# Altium PCB Airplane_System_Board.PcbDoc
Units mil, origin at the board's own origin, x right, y up, seen from the top; angles counter-clockwise.
Board outline 1525 x 1740 mil, 4 copper layers (Top Layer, Layer 1, Layer 2, Bottom Layer), stack 23.756 mil thick; 34 components, 22 nets, 201 pads, 33 vias.
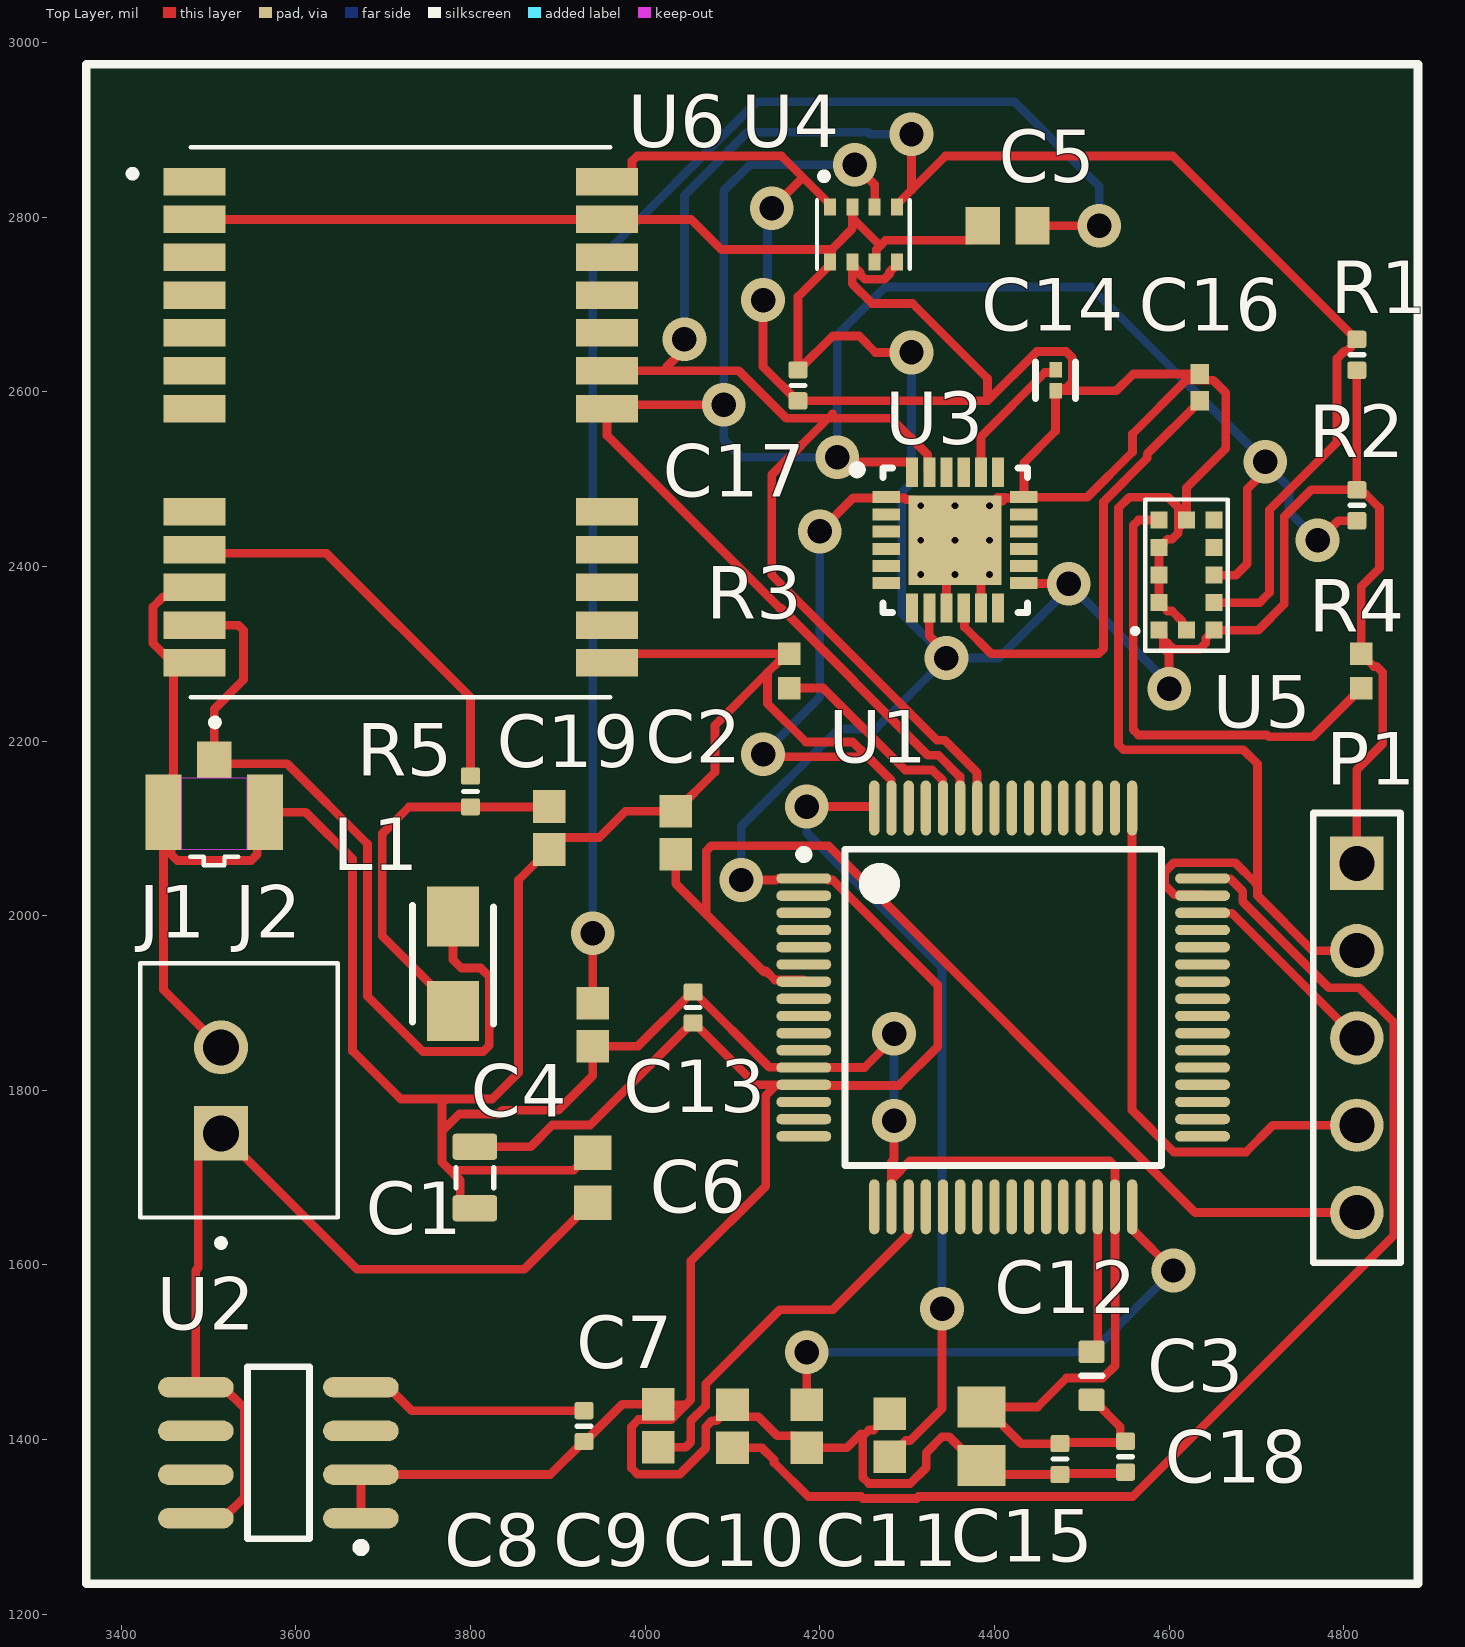
[diagram p0: Top Layer view]
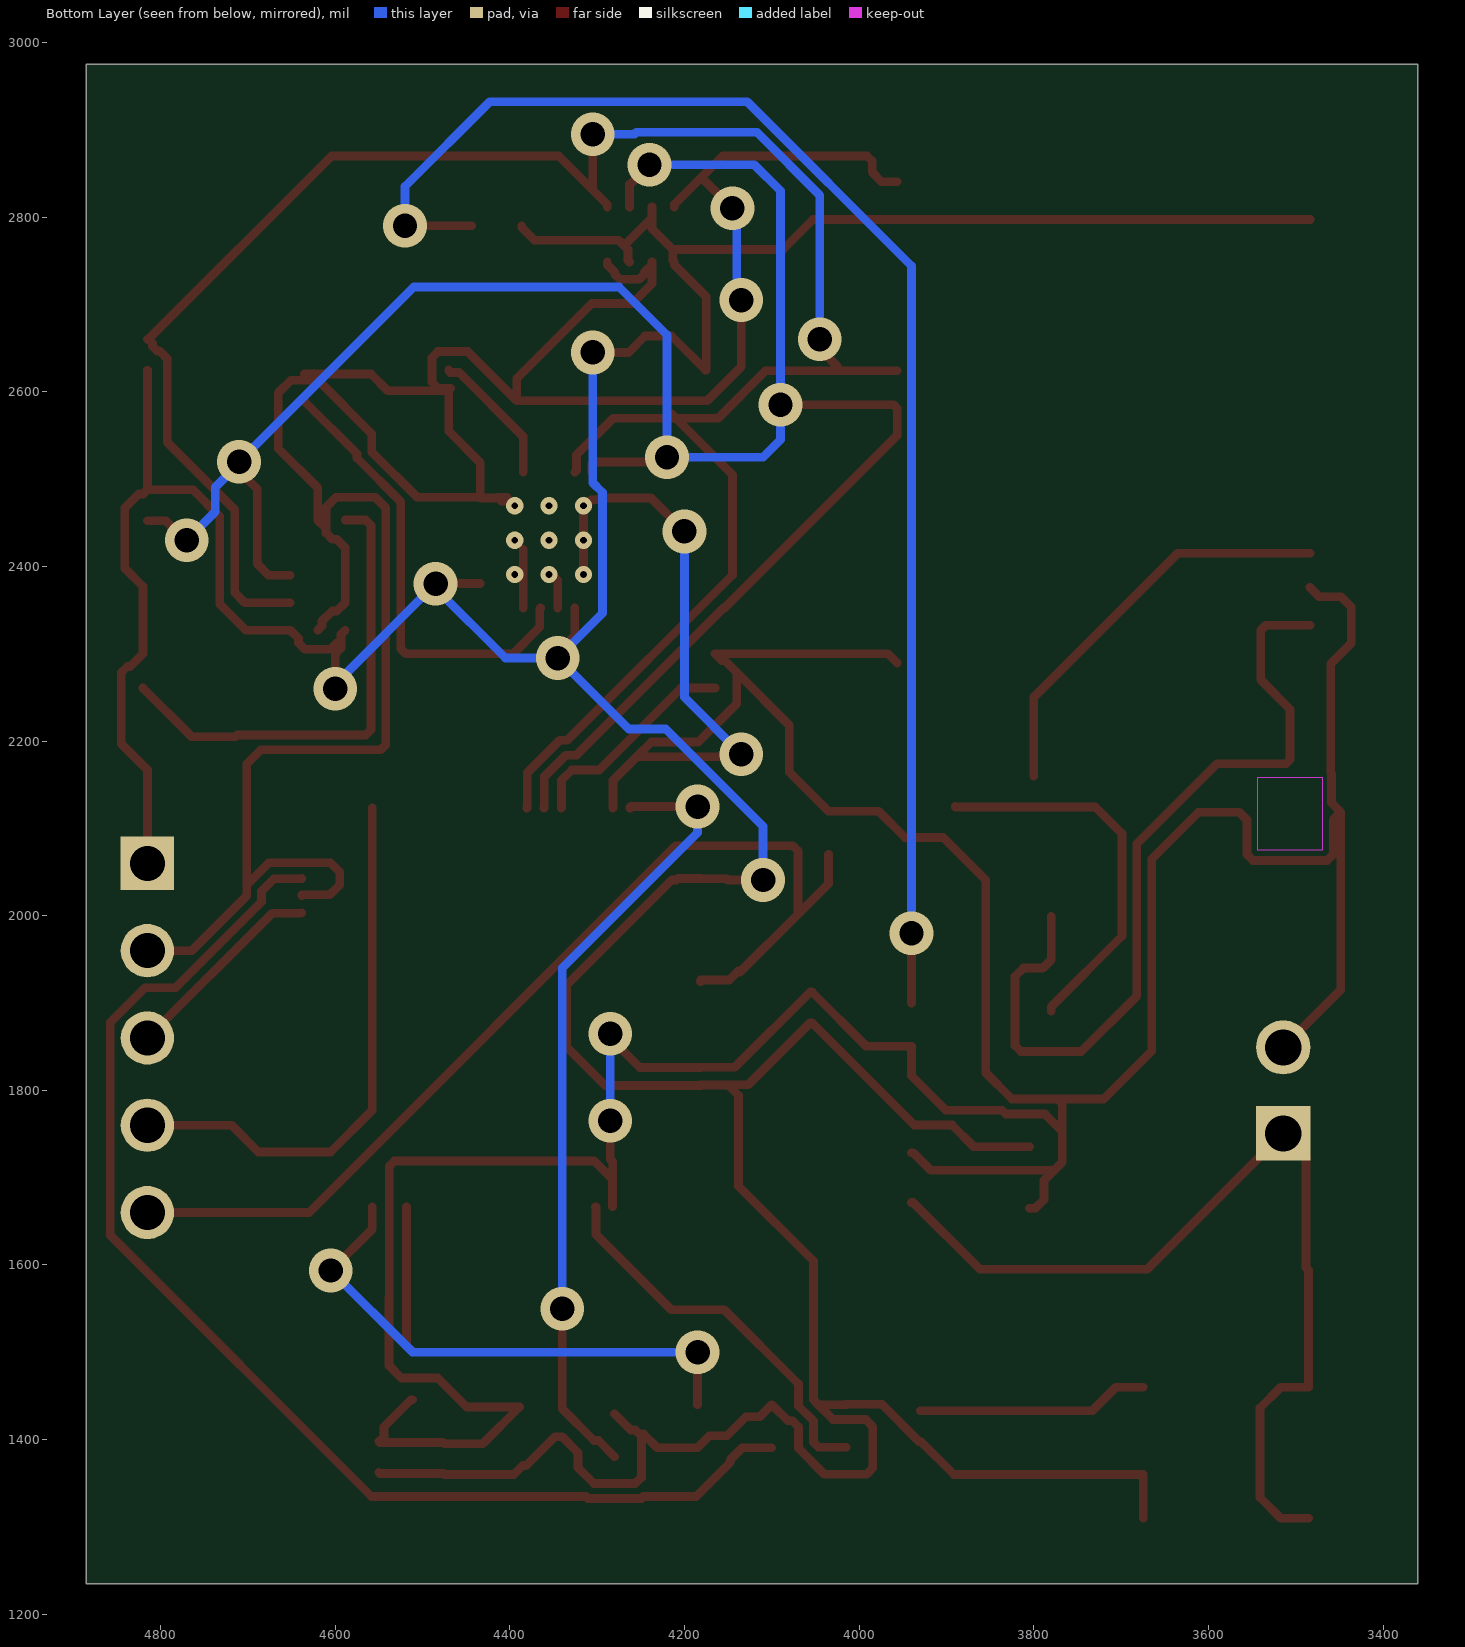
[diagram p1: Bottom Layer view, seen from below]
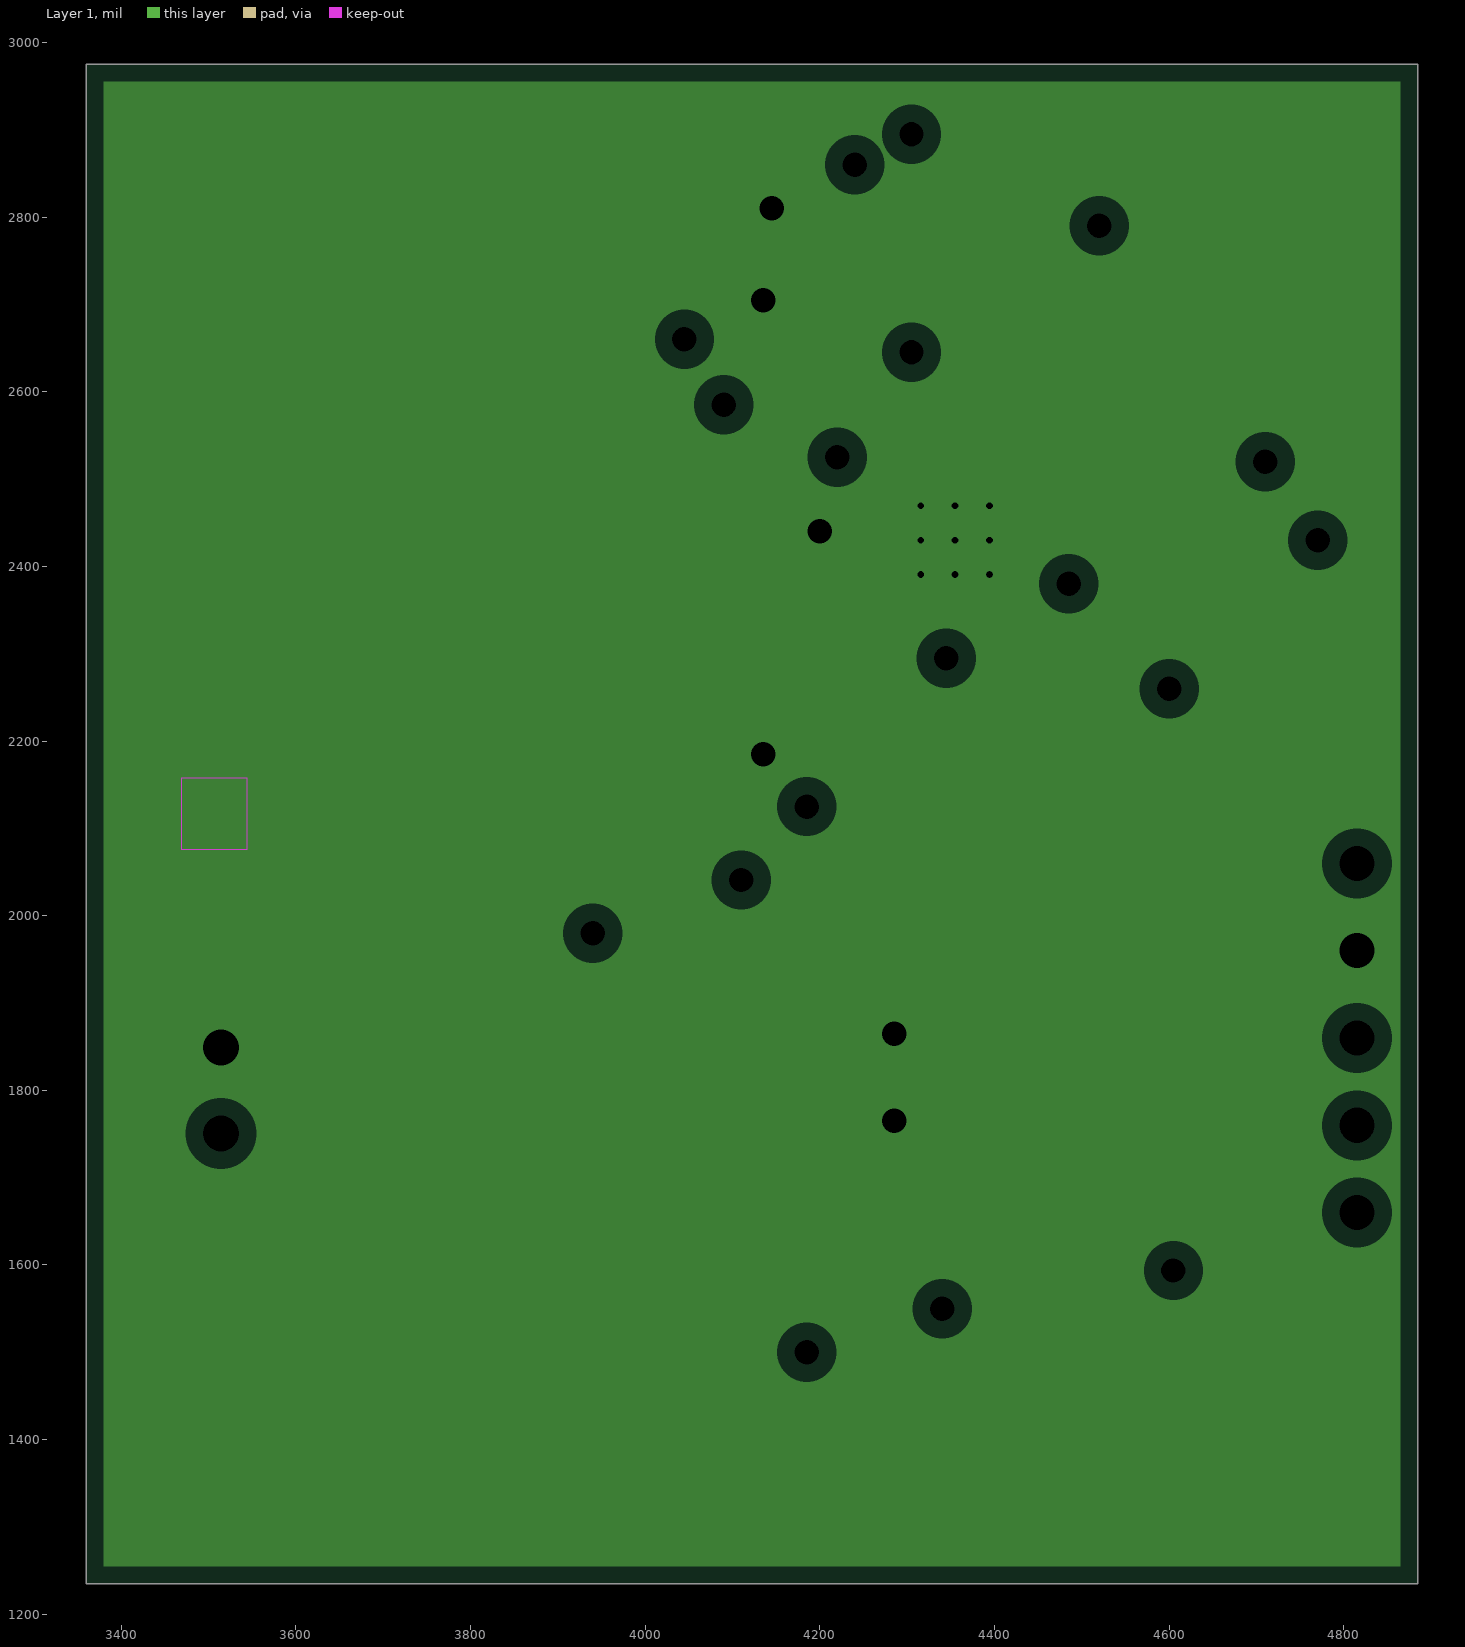
[diagram p2: Layer 1, clearances drawn from the general rule]
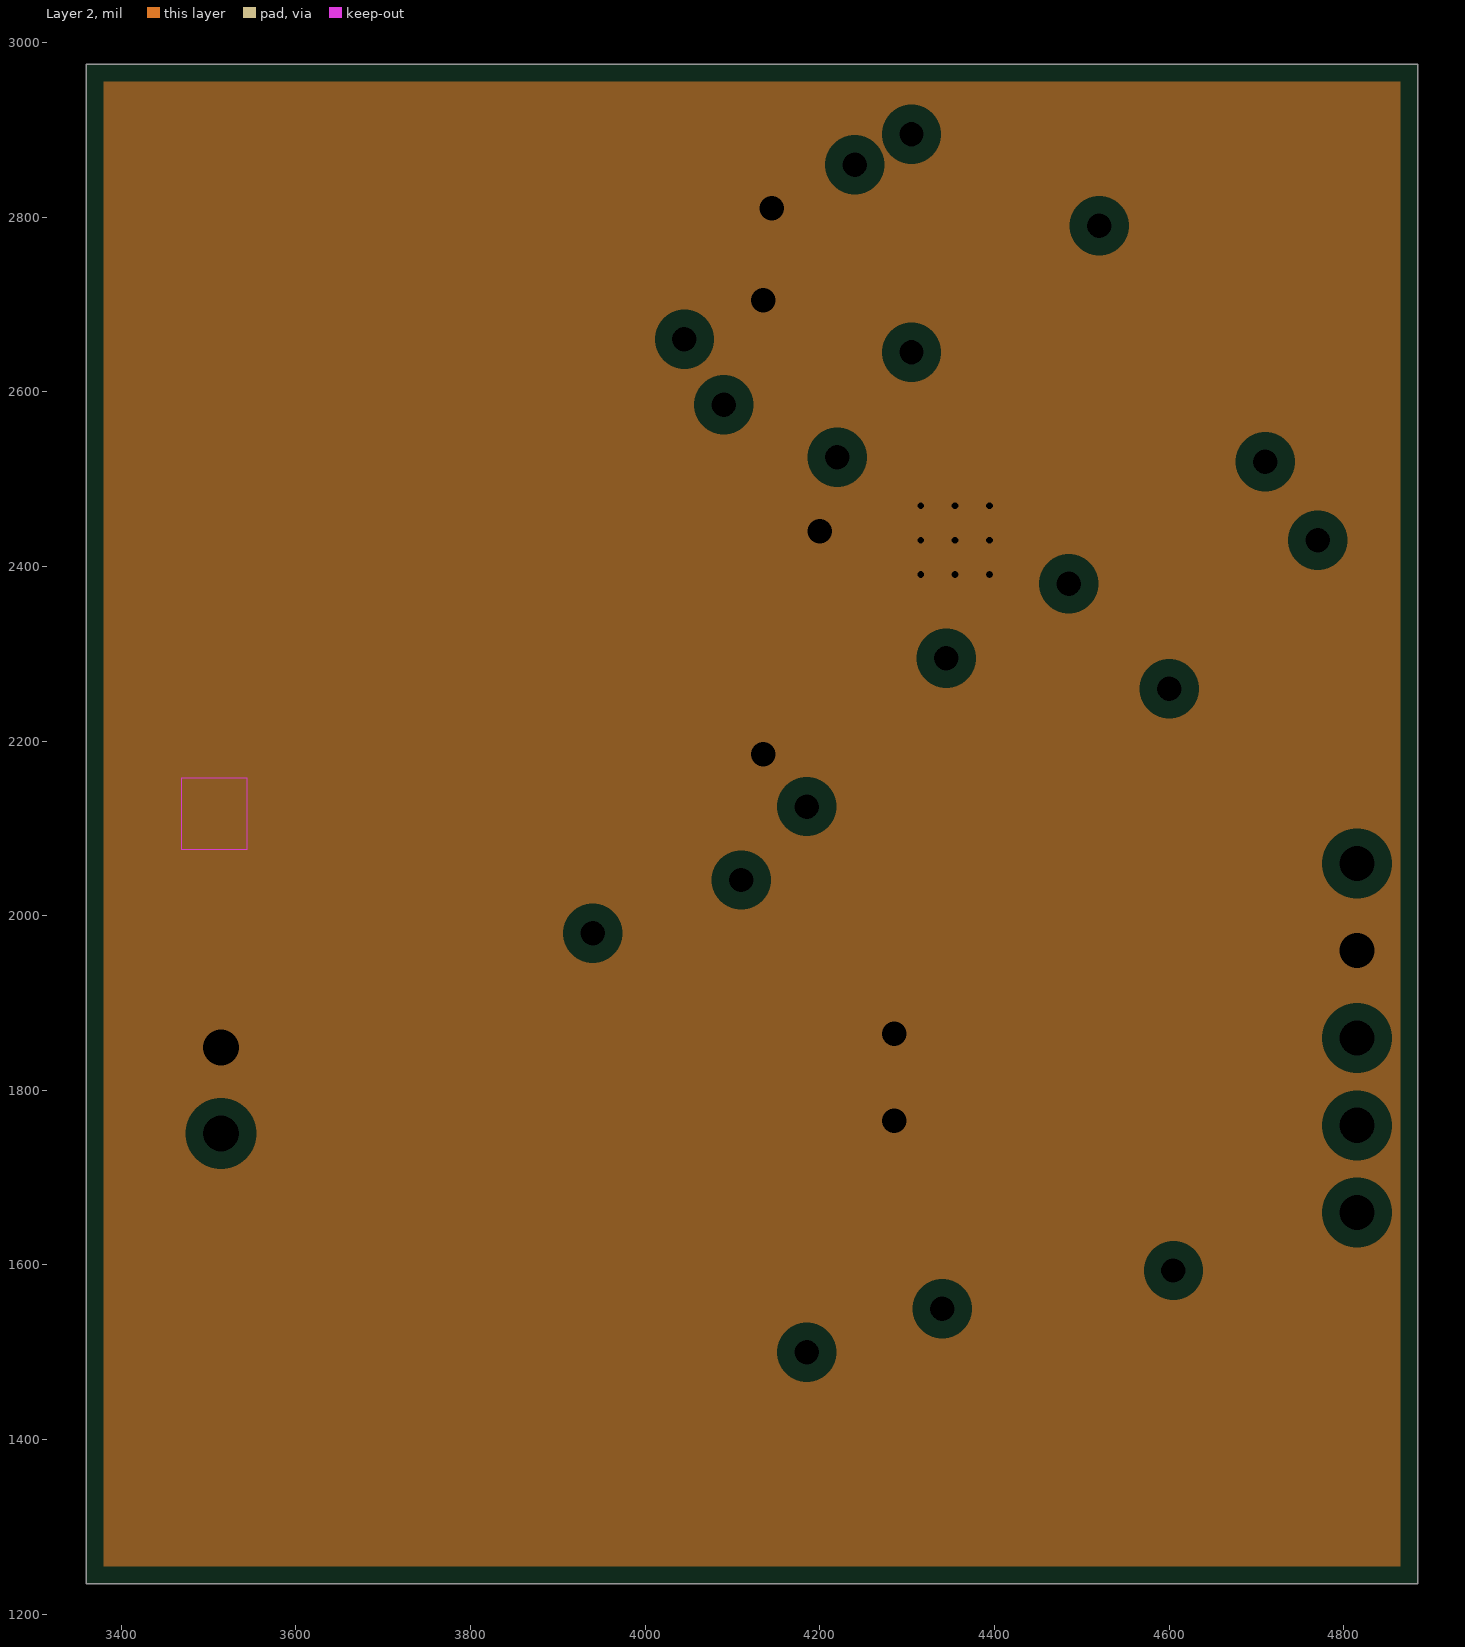
[diagram p3: Layer 2, clearances drawn from the general rule]
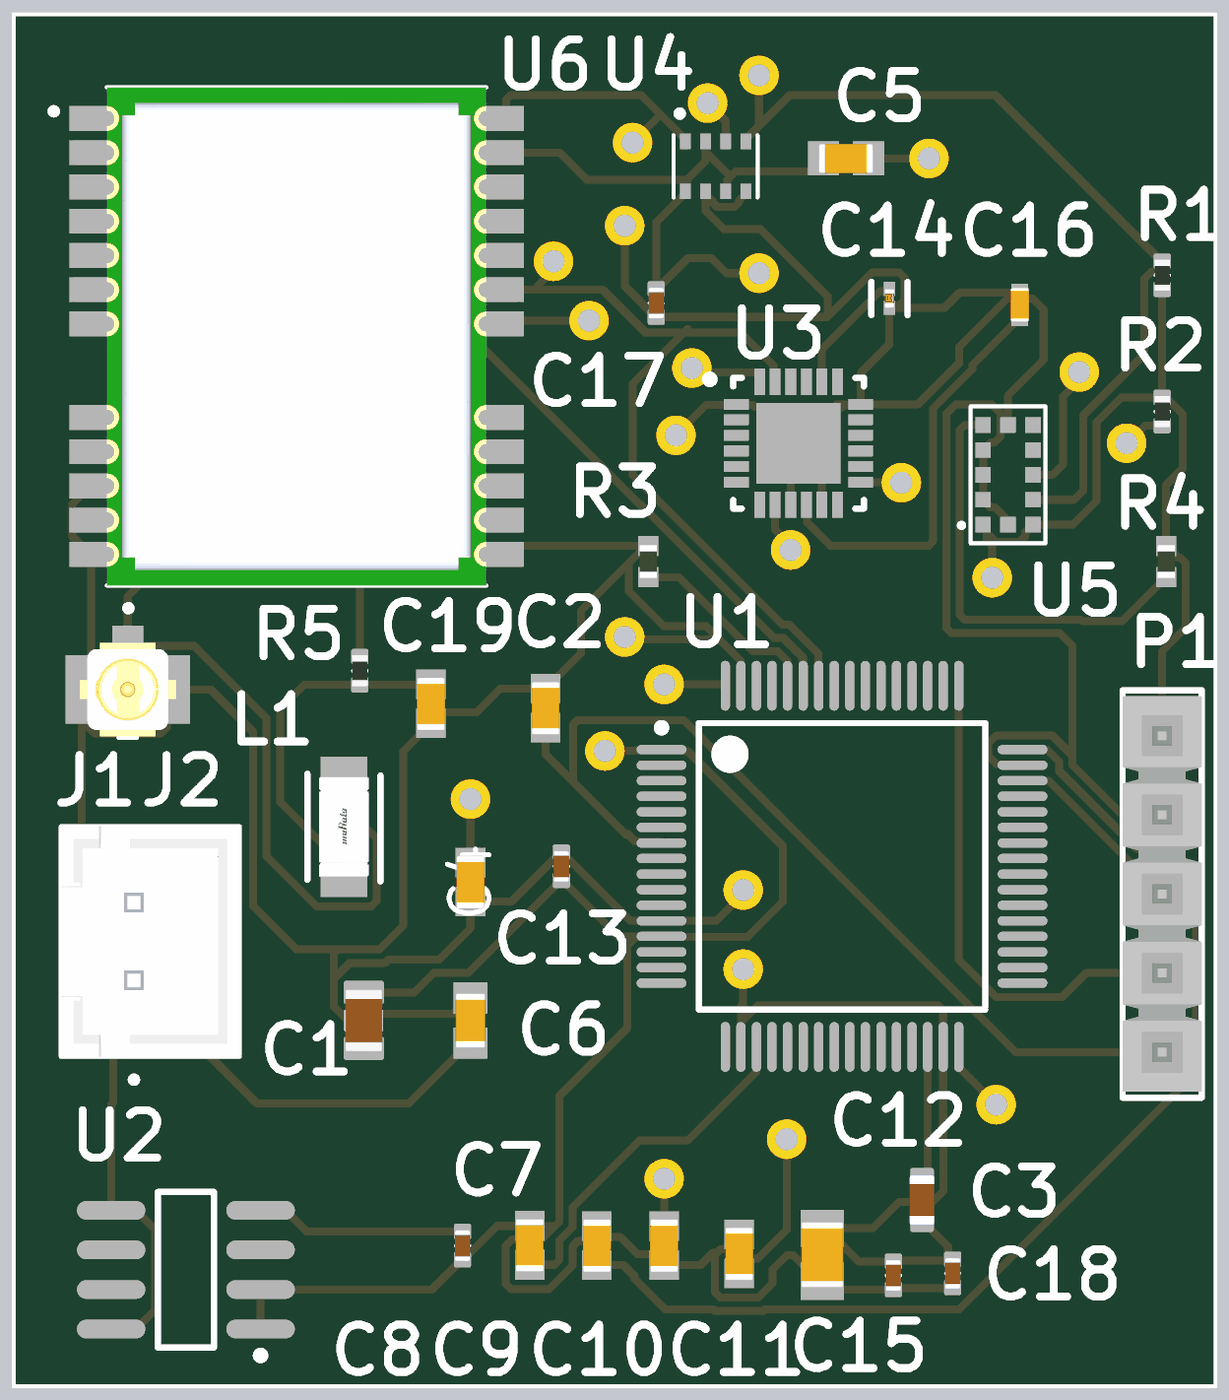
[diagram p4: 3D render of the assembled board from above, using the file's embedded part models]

## Layer stack, top to bottom
Top Solder: solder mask 0.4, Solder Resist, Dk 3.5
Top Layer: signal copper 1.4
Dielectric 2: prepreg 2.8, PP-006, Dk 4.1
Layer 1: plane copper 1.378, net GND
Dielectric 1: dielectric 12.6, FR-4, Dk 4.8
Layer 2: plane copper 1.378, net GND
Dielectric 3: prepreg 2.8, PP-006, Dk 4.1
Bottom Layer: signal copper 1.4
Bottom Solder: solder mask 0.4, Solder Resist, Dk 3.5

## Board outline
3360,1235 3360,2975 4885,2975 4885,1235

## Design rules (kind name [scope] priority, off if disabled: settings)
Clearance [All] p1: gap=5 ignorepadtopadclearanceinfootprint=FALSE
MinimumSolderMaskSliver [All] p1: minsoldermaskwidth=5
PlaneClearance [All] p1: clearance=20
PlaneConnect [All] p1: planeconnectstyle=Relief reliefexpansion=20 reliefentries=4 reliefconductorwidth=10 reliefairgap=10
PolygonConnect [All] p1: connectstyle=Relief reliefconductorwidth=10 reliefentries=4 polygonreliefangle="90 Angle" airgapwidth=10
RoutingVias [All] p1: holewidth=28 width=50 viastyle="Through Hole" minholewidth=28 minwidth=50 maxholewidth=28 maxwidth=50
SilkToSolderMaskClearance [IsPad] p1: minsilkscreentomaskgap=3 clearancetoexposedcopper=TRUE
SolderMaskExpansion [All] p1: expansion=0 istentingtop=FALSE
SupplyNets "Schematic Supply Nets_1" [InNet('GND')] p1: voltage=0.000
SupplyNets "Schematic Supply Nets" [InNet('VCC')] p2: voltage=0.000
Width [All] p1: maxlimit=10 minlimit=10 preferedwidth=10
26 further rules are at their usual default settings.

## Classes and differential pairs
component class U_I2C_BUS: C13 C14 C15 C16 C17 C18 R4 U3 U4 U5
component class U_GPS: C19 J2 L1 R5 U6
component class Airplane_Navigation_&_Telemetry_Schematic: C1 C2 C3 C4 C5 C6 C7 C8 C9 C10 C11 C12 J1 P1 R1 R2 R3 U1 U2

## Components (designator, comment, footprint, x,y, rotation, side; value= is the part's Value field where it differs from the comment)
C1 "Capacitor 10µF +/-20% 25V 0805" CAPC0805(2012)145_L 3805,1700 r270 top value=10µF
C2 "Capacitor 100 nF +/-10% 50 V 0603" CAPC1608X90X40NL10T20 4035,2095 r90 top value=100nF
C3 "Capacitor 4.7µF +/-20% 10V 0603" CAPC0603(1608)100_L 4511.24,1473.11 r270 top value=4.7µF
C4 "Capacitor 100 nF +/-10% 50 V 0603" CAPC1608X90X40NL10T20 3940,1875 r270 top value=100nF
C5 "Capacitor 1uF +/- 10% 16V 0603" CAPC1608X90X35ML15T15 4415,2790 r0 top value=1µF
C6 "Capacitor 1uF +/- 10% 16V 0603" CAPC1608X90X35ML15T15 3940,1700 r270 top value=1µF
C7 "Capacitor 10nF +/-20% 50V 0402" CAPC0402(1005)60_L 3930,1415.43 r90 top value=10nF
C8 "Capacitor 100 nF +/-10% 50 V 0603" CAPC1608X90X40NL10T20 4015,1415.83 r90 top value=100nF
C9 "Capacitor 100 nF +/-10% 50 V 0603" CAPC1608X90X40NL10T20 4100,1415.43 r90 top value=100nF
C10 "Capacitor 100 nF +/-10% 50 V 0603" CAPC1608X90X40NL10T20 4185,1415.43 r270 top value=100nF
C11 "Capacitor 100 nF +/-10% 50 V 0603" CAPC1608X90X40NL10T20 4280,1405.04 r90 top value=100nF
C12 "Capacitor 10 uF +/- 10% 16 V 0805" CAPC2013X135X45NL10T25 4385,1403.9 r270 top value=10µF
C13 "Capacitor 100nF +/-20% 10V 0402" CAPC0402(1005)60_L 4055,1895 r270 top value=100nF
C14 "GRM033R70J222JA01J" FP-GRM033-0_03-IPC_B 4470,2613.02 r90 top
C15 "Capacitor 100nF +/-20% 10V 0402" CAPC0402(1005)60_L 4475,1377.72 r90 top value=100nF
C16 "Capacitor 0.1 uF +/- 5% 16 V 0402" CAPC1005X56X25LL10T15 4635,2605 r90 top value=100nF
C17 "Capacitor 100nF +/-20% 10V 0402" CAPC0402(1005)60_L 4175,2607.28 r90 top value=100nF
C18 "Capacitor 100nF +/-20% 10V 0402" CAPC0402(1005)60_L 4550,1380.43 r270 top value=100nF
C19 "Capacitor 100 nF +/-10% 50 V 0603" CAPC1608X90X40NL10T20 3890,2100.39 r90 top value=100nF
J1 "B2B-XH-A_(LF)(SN)" JST_B2B-XH-A_(LF)(SN) 3535,1800 r270 top
J2 "20279-001E-03" IPEX_20279-001E-03 3506.51,2118.58 r180 top
L1 "LQW31HN27NJ03L" FP-LQW31HN_03-MFG 3780,1945 r90 top
P1 "TSW-105-05-L-S" SMTC-TSW-105-05-X-S 4815,2060 r270 top
R1 "Resistor 4K7  +/-1 % 0402 63 mW" RESC0402(1005)_L 4815,2642.28 r270 top value=4.7k
R2 "Resistor 4K7  +/-1 % 0402 63 mW" RESC0402(1005)_L 4815,2470 r90 top value=4.7k
R3 "Resistor 10k +/-1% 0402 100 mW" RESC1005X40X25ML05T05 4165,2280.31 r90 top value=10k
R4 "Resistor 10k +/-1% 0402 100 mW" RESC1005X40X25ML05T05 4820,2280.31 r90 top value=10k
R5 "Resistor 10R  +/-1 % 0402 63 mW" RESC0402(1005)_L 3800,2142.28 r270 top value=10
U1 "STM32F411RET6" STM-LQFP64_L 4410,1895 r0 top
U2 "LT1763IS8-3.3#PBF" LT-S8-8_N 3580,1385 r180 top
U3 "MPU6050" INSE-QFN-24_V 4355,2430 r0 top
U4 "BMP280" XDCR_BMP280 4250,2780 r90 top
U5 "VL53L0X" SENSOR_VL53L0X 4620,2390 r90 top
U6 "NEO-M9N-00B" XCVR_NEO-M9N-00B 3720,2565 r0 top

## Footprints (in the part's own frame and the unit in brackets; to place one, negate y for a bottom-side part, rotate by r counter-clockwise, add the part's x,y. Pads: shape width x height; smd on the part's side, far side on the other; paste and mask are expansions set on the pad)
CAPC0402(1005)60_L [mm] "Chip Capacitor, Body 1.0x0.5mm, Height 0.6mm, IPC High Density"
  rrect25% 0.5x0.55 smd: 1(-0.45,0) 2(0.45,0)
  silkscreen extent 0,-0.2 0,0.2, body extent -0.5,-0.25 0.5,0.25, height 0.6
CAPC0603(1608)100_L [mm] "Chip Capacitor, Body 1.6x0.8mm, Height 1.0mm, IPC High Density"
  rrect25% 0.66x0.76 smd: 1(-0.7,0) 2(0.7,0)
  silkscreen extent 0,-0.3 0,0.3, body extent -0.8,-0.4 0.8,0.4, height 0.95
CAPC0805(2012)145_L [mm] "Chip Capacitor, Body 2.0x1.2mm, Height 1.45mm, IPC High Density"
  rrect25% 0.76x1.3 smd: 1(-0.9,0) 2(0.89,0)
  silkscreen extent -0.3,-0.55 0.3,0.55, body extent -1,-0.6 1,0.6, height 1.45
CAPC1005X56X25LL10T15 [mm] "Chip Capacitor, 2-Leads, Body 1.10x0.60mm, IPC High Density"
  rect 0.58x0.54 smd: 1(-0.39,0) 2(0.39,0)
  body extent -0.55,-0.3 0.55,0.3, height 0.56
CAPC1608X90X35ML15T15 [mm] "Chip Capacitor, 2-Leads, Body 1.75x0.95mm, IPC Low Density"
  rect 1x1.1 smd: 1(-0.725,0) 2(0.725,0)
  body extent -0.87,-0.48 0.87,0.48, height 0.9
CAPC1608X90X40NL10T20 [mm] "Chip Capacitor, 2-Leads, Body 1.70x0.90mm, IPC Medium Density"
  rect 0.95x0.95 smd: 1(-0.625,0) 2(0.625,0)
  body extent -0.85,-0.45 0.85,0.45, height 0.9
CAPC2013X135X45NL10T25 [mm] "Chip Capacitor, 2-Leads, Body 2.10x1.35mm, IPC Medium Density"
  rect 1.2x1.4 smd: 1(-0.85,0) 2(0.85,0)
  body extent -1.05,-0.67 1.05,0.67, height 1.35
FP-GRM033-0_03-IPC_B [mil]
  rect 17.88x14.28 smd paste+0 mask+0: 1(-11.98,0) 2(11.98,0)
  silkscreen extent -21,-23 21,23, body extent -27,-13 27,13, height 10
FP-LQW31HN_03-MFG [mm]
  rect 1.75x1.5 smd paste+0 mask+0: 1(-1.375,0) 2(1.375,0)
  silkscreen extent -1.75,-1.17 1.7,1.17, body extent -2.35,-1 2.35,1, height 0.25
INSE-QFN-24_V [mm] "QFN, 24-Leads, Body 4.00x4.00mm, Pitch 0.50mm, Thermal Pad 2.7x2.6mm"
  rect 0.8x0.35 smd: 1(-2,1.25) 2(-2,0.75) 3(-2,0.25) 4(-2,-0.25) 5(-2,-0.75) 6(-2,-1.25) 13(2,-1.25) 14(2,-0.75) 15(2,-0.25) 16(2,0.25) 17(2,0.75) 18(2,1.25)
  rect 0.35x0.85 smd: 7(-1.25,-1.975) 8(-0.75,-1.975) 9(-0.25,-1.975) 10(0.25,-1.975) 11(0.75,-1.975) 12(1.25,-1.975) 19(1.25,1.975) 20(0.75,1.975) 21(0.25,1.975) 22(-0.25,1.975) 23(-0.75,1.975) 24(-1.25,1.975)
  rect 2.7x2.6 smd: 25(0,0)
  silkscreen extent -2.97,-2.1 2.1,2.17, body extent -2,-2 2,2, height 0.95
IPEX_20279-001E-03 [mm]
  rect 1x1.05 smd: 1(0,-1.525)
  rect 1.05x2.2 smd: 2(1.475,0) 3(-1.475,0)
  Keep-Out Layer region: 0.95,-1 -0.95,-1 -0.95,1.1 0.95,1.1
  silkscreen extent -0.7,-2.71 0.7,1.55, body extent -1.5,-1.55 1.5,1.55, height 1.25
JST_B2B-XH-A_(LF)(SN) [mm]
  rect 1.575x1.575 / inner round 1.575 / far side rect 1.575x1.575 hole 1.05: 1(1.25,-0.525)
  round 1.575 hole 1.05: 2(-1.25,-0.525)
  silkscreen extent -3.7,-2.88 4.54,2.88, body extent -3.7,-2.88 3.7,2.88, height 7
LT-S8-8_N [mm] "SOIC, 8-Leads, Body 4.9x3.9mm, Pitch 1.27mm, IPC Medium Density"
  oval 2.2x0.6 smd: 1(-2.4,1.905) 2(-2.4,0.635) 3(-2.4,-0.635) 4(-2.4,-1.905) 5(2.4,-1.905) 6(2.4,-0.635) 7(2.4,0.635) 8(2.4,1.905)
  silkscreen extent -2.53,-2.5 0.9,2.88, body extent -2,-2.5 2,2.5, height 1.76
RESC0402(1005)_L [mm] "Chip Resistor, Body 1.0x0.5mm, IPC High Density"
  rrect25% 0.5x0.55 smd: 1(-0.45,0) 2(0.45,0)
  silkscreen extent 0,-0.2 0,0.2, body extent -0.5,-0.25 0.5,0.25, height 0.3
RESC1005X40X25ML05T05 [mm] "Chip Resistor, 2-Leads, Body 1.05x0.55mm, IPC Low Density"
  rect 0.65x0.65 smd: 1(-0.5,0) 2(0.5,0)
  body extent -0.53,-0.28 0.53,0.28, height 0.4
SENSOR_VL53L0X [mm]
  rect 0.5x0.5 smd: 1(-1.6,0.8) 2(-0.8,0.8) 3(0,0.8) 4(0.8,0.8) 5(1.6,0.8) 6(1.6,0) 7(1.6,-0.8) 8(0.8,-0.8) 9(0,-0.8) 10(-0.8,-0.8) 11(-1.6,-0.8) 12(-1.6,0)
  silkscreen extent -2.2,-1.2 2.2,1.57
SMTC-TSW-105-05-X-S [mm] ".025 SQ Post Terminal Strip Assembly, 1x5 Pins, Vertical, 2.54mm Pitch, Male"
  rect 1.55x1.55 hole 1.02: 1(0,0)
  round 1.55 hole 1.02: 2(2.54,0) 3(5.08,0) 4(7.62,0) 5(10.16,0)
  silkscreen extent -1.46,-1.27 11.62,1.27, body extent -1.27,-1.27 11.43,1.27, height 5.21
STM-LQFP64_L [mm] "QFP, 64-Leads, Body 10x10mm, Pitch 0.5mm, IPC High Density"
  oval 1.6x0.3 smd: 1(-5.8,3.75) 2(-5.8,3.25) 3(-5.8,2.75) 4(-5.8,2.25) 5(-5.8,1.75) 6(-5.8,1.25) 7(-5.8,0.75) 8(-5.8,0.25) 9(-5.8,-0.25) 10(-5.8,-0.75) 11(-5.8,-1.25) 12(-5.8,-1.75) 13(-5.8,-2.25) 14(-5.8,-2.75) 15(-5.8,-3.25) 16(-5.8,-3.75) 33(5.8,-3.75) 34(5.8,-3.25) 35(5.8,-2.75) 36(5.8,-2.25) 37(5.8,-1.75) 38(5.8,-1.25) 39(5.8,-0.75) 40(5.8,-0.25) 41(5.8,0.25) 42(5.8,0.75) 43(5.8,1.25) 44(5.8,1.75) 45(5.8,2.25) 46(5.8,2.75) 47(5.8,3.25) 48(5.8,3.75)
  oval 0.3x1.6 smd: 17(-3.75,-5.8) 18(-3.25,-5.8) 19(-2.75,-5.8) 20(-2.25,-5.8) 21(-1.75,-5.8) 22(-1.25,-5.8) 23(-0.75,-5.8) 24(-0.25,-5.8) 25(0.25,-5.8) 26(0.75,-5.8) 27(1.25,-5.8) 28(1.75,-5.8) 29(2.25,-5.8) 30(2.75,-5.8) 31(3.25,-5.8) 32(3.75,-5.8) 49(3.75,5.8) 50(3.25,5.8) 51(2.75,5.8) 52(2.25,5.8) 53(1.75,5.8) 54(1.25,5.8) 55(0.75,5.8) 56(0.25,5.8) 57(-0.25,5.8) 58(-0.75,5.8) 59(-1.25,5.8) 60(-1.75,5.8) 61(-2.25,5.8) 62(-2.75,5.8) 63(-3.25,5.8) 64(-3.75,5.8)
  silkscreen extent -5.92,-4.6 4.6,4.6, body extent -5,-5 5,5, height 1.6
XCVR_NEO-M9N-00B [mm]
  rect 1.8x0.8 smd paste-2: 1(-6,7) 2(-6,5.9) 3(-6,4.8) 4(-6,3.7) 5(-6,2.6) 6(-6,1.5) 7(-6,0.4) 8(-6,-2.6) 9(-6,-3.7) 10(-6,-4.8) 11(-6,-5.9) 12(-6,-7) 13(6,-7) 14(6,-5.9) 15(6,-4.8) 16(6,-3.7) 17(6,-2.6) 18(6,0.4) 19(6,1.5) 20(6,2.6) 21(6,3.7) 22(6,4.8) 23(6,5.9) 24(6,7)
  silkscreen extent -7.9,-8 6.1,8, body extent -6.1,-8 6.1,8, height 2.6
XDCR_BMP280 [mm]
  rect 0.5x0.35 smd: 1(0.8,0.975) 2(0.8,0.325) 3(0.8,-0.325) 4(0.8,-0.975) 5(-0.8,-0.975) 6(-0.8,-0.325) 7(-0.8,0.325) 8(-0.8,0.975)
  silkscreen extent -1,-1.35 1.79,1.35

## Part data
C1: library part CMP-001-00079-4, "Chip Capacitor, 10µF +/-20%, 25V, 0805, Thickness 1.45 mm", Case/Package=0805, Max Operating Temperature=85°C, Min Operating Temperature=-55°C, Tolerance=10%, Voltage Rating=25V, Mounting Technology=SMT, Pins=2
C2 C4 C8 C9 C10 C11 C19: library part CMP-001-00017-6, "Chip Capacitor, 100 nF, +/- 10%, 50 V, 0603 (1608 Metric)", Capacitor Type=Ceramic, Case/Package=0603, Max Operating Temperature=125°C, Min Operating Temperature=-55°C, Tolerance=10%, Voltage Rating=50V, Mounting Technology=SM, Pins=2, RoHS Compliant=True
C3: library part CMP-001-00076-4, "Chip Capacitor, 4.7µF +/-20%, 10V, 0603, Thickness 1 mm", Case/Package=0603, Max Operating Temperature=85°C, Min Operating Temperature=-55°C, Tolerance=10%, Voltage Rating=10V, Mounting Technology=SMT, Pins=2
C5 C6: library part CMP-001-00004-6, "Chip Capacitor, 1 uF, +/- 10%, 16 V, 0603 (1608 Metric)", Capacitor Type=Ceramic, Case/Package=0603, Max Operating Temperature=125°C, Min Operating Temperature=-55°C, Tolerance=10%, Voltage Rating=16V, Mounting Technology=SM, Pins=2, RoHS Compliant=True
C7: library part CMP-001-00069-3, "Chip Capacitor, 10nF +/-20%, 50V, 0402, Thickness 0.6 mm", Case/Package=0402, Max Operating Temperature=85°C, Min Operating Temperature=-55°C, Tolerance=5%, Voltage Rating=50V, Mounting Technology=SMT, Pins=2
C12: library part CMP-001-00015-6, "Chip Capacitor, 10 uF, +/- 10%, 16 V, 0805 (2012 Metric)", Capacitor Type=Ceramic, Case/Package=0805, Max Operating Temperature=85°C, Min Operating Temperature=-55°C, Tolerance=10%, Voltage Rating=16V, Mounting Technology=SM, Pins=2, RoHS Compliant=True
C13 C15 C17 C18: library part CMP-001-00061-3, "Chip Capacitor, 100nF +/-20%, 10V, 0402, Thickness 0.6 mm", Case/Package=0402, Max Operating Temperature=85°C, Min Operating Temperature=-55°C, Tolerance=20%, Voltage Rating=10V, Mounting Technology=SMT, Pins=2
C14: library part CMP-06035-025705-1, "Chip Multilayer Ceramic Capacitors for General Purpose, 0201, 2200pF, X7R, 15%, 5%, 6.3V", Capacitance=2.2nF, Dielectric=X7R, Tolerance=5%, Voltage Rating (DC)=6.3V, Length=600um, Thickness=300um, Width=300um
C16: library part CMP-001-00001-6, "Chip Capacitor, 0.1 uF, +/- 5%, 16 V, 0402 (1005 Metric)", Capacitor Type=Ceramic, Case/Package=0402, Max Operating Temperature=125°C, Min Operating Temperature=-55°C, Tolerance=5%, Voltage Rating=16V, Mounting Technology=SM, Pins=2, RoHS Compliant=True
J1: library part CMP-002-00072-1, "Connector Header Through Hole 2 position 0.098 (2.50mm)", Case/Package=None, Check_prices=https://www.snapeda.com/parts/B2B-XH-A%20(LF)(SN)/JST+Sales+America+Inc./view-part/?ref=eda, Component Type=Standard, Design Item ID=B2B-XH-A_(LF)(SN), MF="JST Sales", MP="B2B-XH-A (LF)(SN)", Pins=2, SnapEDA_Link=https://www.snapeda.com/parts/B2B-XH-A%20(LF)(SN)/JST+Sales+America+Inc./view-part/?ref=snap, Source=B2B-XH-A_(LF)(SN).SchLib
J2: library part CMP-002-00071-1, "1 POS Vertical SMD Small form factor with big performance through 6 GHz connector,MHF, RF, micro-coaxial MHF I Receptacle", Case/Package=None, Check_prices=https://www.snapeda.com/parts/20279-001E-03/I-PEX/view-part/?ref=eda, Component Type=Standard, Design Item ID=20279-001E-03, MF=I-PEX, MP=20279-001E-03, Pins=3, SnapEDA_Link=https://www.snapeda.com/parts/20279-001E-03/I-PEX/view-part/?ref=snap, Source=20279-001E-03.SchLib
L1: library part CMP-06042-006372-1, "Wire Wound RF Inductor 27nH ±5% 0.0714Ω 560mA 1206", Case Code (Imperial)=1206, Case Code (Metric)=3216, Current Rating=560mA, DC Resistance (DCR)=51mR, Inductance=27nH, Max Operating Temperature=85°C, Min Operating Temperature=-40°C, Package Quantity=2000, Resistor Type=Wirewound, Self Resonant Frequency=1GHz, Test Frequency=100MHz, Tolerance=5%, Case/Package=1206, Core Material=Ferrite, DC Current=560mA, Depth=1.8mm, Height=1.8mm, Height - Seated (Max)=0.079inch, Length=3.2mm, Max DC Current=560mA, Military Standard=Not, Mount="Surface Mount", Packaging="Tape and Reel", Q Factor=60, Radiation Hardening=No, Shielding=Unshielded, Termination=SMD/SMT, Weight=0.000705oz, Width=0.063inch
P1: library part CMP-1024-00366-1, "0.025\" SQ Post Header, Through-hole, Vertical, -55 to 125 degC, 2.54 mm Pitch, 5-Pin, Male, RoHS", Manufacturer=Samtec, Temperature Range="-55 to 125 degC", ComponentLink1Description="Manufacturer URL", ComponentLink1URL=http://www.samtec.com, ComponentLink2Description=Datasheet, ComponentLink2URL=http://www.samtec.com/documents/webfiles/pdf/TSW_TH.PDF, ComponentLink3Description="Package Specification", ComponentLink3URL=http://www.samtec.com/documents/webfiles/cpdf/TSW-XXX-XX-XXX-X-XX-XXX-MKT.pdf, DatasheetVersion=F-214, Mounting Technology=Through-hole, Orientation=Vertical, PackageDescription=".025[0.64] SQ. Post Terminal Strip Assembly", PackageReference=TSW-105-05-X-S, PackageVersion="DM, 8/1988", PartNumber=TSW-105-05-L-S, Pitch="2.54 mm", RoHS=True
R1 R2: library part CMP-009-00158-3, "Chip Resistor, 4,7 kOhms, +/-1 %, 63 mW, -55 to 155 degC, 0402", Case/Package=0402, Max Operating Temperature=155°C, Min Operating Temperature=-55°C, Power=63mW, Tolerance=1%, Pins=2
R3 R4: library part CMP-009-00015-5, "Chip Resistor, 10 KOhm, +/- 1%, 0.1 W, -55 to 155 degC, 0402 (1005 Metric)", Case/Package=0402, Max Operating Temperature=155°C, Min Operating Temperature=-55°C, Power=100mW, Tolerance=1%, Voltage Rating=50V, Mounting Technology=SM, Pins=2, RoHS Compliant=True
R5: library part CMP-009-00152-3, "Chip Resistor, 10 Ohms, +/-1 %, 63 mW, -55 to 155 degC, 0402", Case/Package=0402, Max Operating Temperature=155°C, Min Operating Temperature=-55°C, Power=63mW, Tolerance=1%, Pins=2
U1: library part CMP-0243-00169-1, "ARM Cortex-M4 32-bit MCU+FPU, 512 KB Flash, 128 KB RAM, 50 I/Os, 64-Pin LQFP, -40 to 85 degC, Tray", I/Os (High Current)=50, Operating Frequency(F) (Processor speed) (MHz)=100, Package Description=LQFP64, Package Reference="64-Pin Low-profile Quad Flat Package, Body 10 x 10 mm, Pitch 0.5 mm", Supply Voltage(Vcc) min (V)=1.7, ComponentLink1Description="Manufacturer URL", ComponentLink1URL=http://www.st.com/, ComponentLink2Description=Datasheet, ComponentLink2URL=http://www.st.com/st-web-ui/static/active/en/resource/technical/document/datasheet/DM00115249.pdf, Core="ARM Cortex-M4", DatasheetVersion="Rev. 6", FLASH Size (Prog) (kB)=512, Internal RAM Size (kB)=128, Mounting Technology="Surface Mount", Packing=Tray
U2: library part CMP-0476-01566-1, "500 mA, Low Noise, LDO Micropower Regulator, 1.8 to 20 V Vin, 3.3 V Vout, 8-pin SOIC (S8-8), -40 to 125 degC, Pb-Free", Dropout Voltage(V)=0.3, Manufacturer="Linear Technology", Output Voltage="3.3 V", Shutdown Current(uA)=1, ComponentLink1Description="Manufacturer URL", ComponentLink1URL=http://www.linear.com/, ComponentLink2Description=Datasheet, ComponentLink2URL=http://cds.linear.com/docs/en/datasheet/1763fg.pdf, ComponentLink3Description="Package Specification", ComponentLink3URL=http://cds.linear.com/docs/en/packaging/05081610_G_SO8.pdf, DatasheetVersion="Rev. G", Discrete Pass Element=no, Iout(mA)=500, Isupply(mA)=0.03, Mounting Technology="Surface Mount", Noise(uV)=20, Number of Outputs=1, PackageDescription="8-Pin Plastic Small Outline (Narrow .150 Inch), Body 4.9 x 3.9 mm, Pitch 1.27 mm", PackageReference=S8-8, PackageVersion="Rev. G, 03/2012", PartNumber=LT1763IS8-3.3#PBF, PSRR(dB)=65, RoHS=TRUE, Vin Max(V)=20, Vin Min(V)=1.8
U3: library part CMP-010-00014-3, "3-Axis Gyroscope, 3-Axis Accelerometer, 2.375 to 3.46 V, -40 to 105 degC, 24-Pin QFN, RoHS, Tape and Reel", Case/Package=QFN, Manufacturer=InvenSense, Max Operating Temperature=85°C, Max Supply Voltage=3.6V, Min Operating Temperature=-40°C, Min Supply Voltage=2.5V, Package Description="24-Pin Quad Flat No-lead Package, Body 4 x 4 mm, Pitch 0.5 mm", Package Quantity=5000, Package Reference=QFN-24, Datasheet URL=https://datasheet.ciiva.com/1513/1788002-1513632.pdf, Datasheet Version="Rev. 3.4, 08/2013", Interface=I2C, Mounting Technology=SM, Packaging=CutTape, Pins=24, RoHS Compliant=True, Sensor Type=Motion
U4: library part CMP-00029-00001-1, "BMP280 Absolute Barometric Pressure Sensor for Battery Powered Devices 2 x 2.5mm", Case/Package=None, Availability=Unavailable, Component Type=Standard, Design Item ID=BMP280, MP=BMP280, Pins=8, Price=None, Source=BMP280.SchLib
U5: library part CMP-013-000000-1, "VL53L0X - Light, 3D Time-of-Flight _ToF_ Sensor Evaluation Board", Package=None, Availability=Unavailable, Component Type=Standard, Design Item ID=VL53L0X, MF=STMicroelectronics, MP=VL53L0X, Pin Count=11, Price=None, SnapEDA_Link=https://www.snapeda.com/parts/VL53L0X/STMicroelectronics/view-part/473967/?ref=snap, Source=SnapEDAsch.SchLib
U6: library part CMP-015-000000-1, "series RF Receiver BeiDou, Galileo, GLONASS, GNSS, GPS - -167dBm - - Module", Package="SMD-24 u-blox", Check_prices=https://www.snapeda.com/parts/NEO-M9N-00B/u-blox/view-part/?ref=eda, Component Type=Standard, Design Item ID=NEO-M9N-00B, MF=u-blox, MP=NEO-M9N-00B, Pin Count=24, SnapEDA_Link=https://www.snapeda.com/parts/NEO-M9N-00B/u-blox/view-part/?ref=snap, Source=NEO-M9N-00B.SchLib

## Via types
v1: diameter 50, hole 28, Top Layer to Bottom Layer, 24 vias
v2: diameter 19.68, hole 7.87, Top Layer to Bottom Layer, 9 vias

## Nets (pads, with @x,y where several pads share a name; then routed paths per layer and width w, separated by ;. In a path a pad name is that pad's centre, name@x,y a point inside that pad or via, vN(x,y) a via of type N, cw(c..) or ccw(c..) an arc to the next point about the centre after c; other vN are vias at no path point)
GND: C1.2 C2.2 C3.2 C4.2 C6.1 C12.1 C13.1 C14.1 C15.2 C16.2 C17.1 C18.1 C19.1 J1.2 J2.2 J2.3 P1.2 R3.2 U1.12 U1.18 U1.31 U1.47 U1.63 U3.1 U3.9 U3.11 U3.18 U3.25 U4.1 U4.5 U4.7 U5.2 U5.3 U5.4 U5.6 U5.12 U6.10 U6.12 U6.13 U6.24 | length 8652.4
  Top Layer w10: U6.10 3473.03,2365.28 3448.19,2365.28 3436.35,2353.44 3436.35,2312 3460,2288.34 3460,2162.98 3459.11,2162.09 3459.11,2129.25 J2.2 ; J1.2 3448.44,1915.1 J2.2 ; C1.2 3798.11,1664.96 3788.15,1674.92 3788.15,1696.95 3776.63,1708.47 ; C6.1 3938.03,1728.54 3917.96,1708.47 3776.63,1708.47 ; U6.13 3966.81,2300 R3.2 4157.2,2292.2 4154.01,2292.2 4140.2,2278.4 ; U6.24 3974.32,2840.59 3985.06,2851.34 3985.06,2864.14 3990.92,2870 4156.06,2870 4211.61,2814.45 U4.1 ; C13.1 4054.02,1912.72 3991.69,1850.39 C4.2 3940,1816.69 3900.54,1777.23 3836.27,1777.23 3832.04,1773 3787.24,1773 3767.41,1753.17 ; C13.1@4055.98,1912.72 4142.25,1826.45 4181.31,1826.45 U1.12 4251.1,1826.1 4285,1860 v1(4285,1865) ; v1(4135,2185) 4138.11,2181.89 4254.73,2181.89 ; v1(4135,2705) 4135,2628.58 4174.02,2589.57 C17.1 4391.93,2589.57 ; v1(4145,2810) 4179.06,2844.06 ; v1(4200,2440) 4238.42,2478.42 4296.98,2478.42 4299.21,2476.18 4306.85,2476.18 4315.63,2467.4 v2(4315.63,2430) v2(4315.63,2390.63) ; U4.7@4237.2,2745.55 4245.91,2736.85 4245.91,2734.52 4251.76,2728.66 4273.83,2728.66 4279.69,2734.52 4279.69,2736.85 4288.39,2745.55 U4.5 ; U4.7 4237.2,2723.66 4259.89,2700.97 4306.1,2700.97 4391.93,2615.14 4391.93,2589.57 ; U1.63 4281.7,2123.69 4281.7,2154.92 4254.73,2181.89 ; v1(4285,1765) 4285,1721.1 4282.05,1718.15 U1.18 4282.39,1667 4282.39,1698.23 4303.17,1719.01 4532.09,1719.01 4537.95,1713.15 U1.31 4537.95,1562.54 4538.2,1562.29 4538.2,1484.6 4524.15,1470.55 4482.45,1470.55 4449.26,1437.36 4388.94,1437.36 4430.87,1395.43 C15.2 4476.36,1396.79 4548.64,1396.79 C18.1 4549.02,1398.15 4544.17,1402.99 4544.17,1414.58 4513.2,1445.55 C3.2 ; U3.9 4345.16,2383.82 4351.65,2390.31 U3.25@4355.31,2390.31 ; U3.11 U3.25@4384.53,2419.53 ; U3.25@4403.15,2474.9 4409.51,2474.9 4413.02,2478.42 4432.94,2478.42 U3.18 ; U3.25@4403.15,2479.02 4413.02,2479.02 ; U5.12 4615.16,2331.85 4615.16,2337.01 4603.32,2348.85 4598.16,2348.85 U5.2 U5.3 U5.4 4598.16,2431.15 4603.32,2431.15 4610.35,2438.18 U5.6@4610.35,2443.34 ; C16.2 4558.9,2620.35 4539.59,2601.04 C14.1 ; U1.47 4638.35,2023.86 4606.21,2023.86 4594.85,2035.22 4594.85,2050.05 4605.34,2060.54 4675.71,2060.54 4698.84,2037.41 ; P1.2 4764.29,1960 4701.33,2022.95 4701.33,2173.67 4685,2190 4547.86,2190 4542,2195.86 4542,2467 4554.21,2479.21 4598.94,2479.21 4610.35,2467.81 U5.6@4610.35,2443.34 ; J2.2 3457.11,2109.91 3457.11,2070.31 3464.14,2063.28 3548.89,2063.28 3555.91,2070.31 3555.91,2109.91 J2.3 3611.42,2118.58 3665,2065 3665,1845 3720,1790 3772.5,1790 ; 3767.41,1753.17 3767.41,1784.91 3772.5,1790 ; 3767.41,1753.17 3767.41,1717.69 3776.63,1708.47 ; 3772.5,1790 3825,1790 3855,1820 3855,2040.79 C19.1 3903.7,2089.49 3947.44,2089.49 3977.56,2119.61 C2.2 4080,2164.61 4080,2218.19 4140.2,2278.4 ; 4140.2,2278.4 4140.2,2242.86 4184.18,2198.89 4237.73,2198.89 4254.73,2181.89 ; 4391.93,2589.57 4448.31,2645.94 4482.11,2645.94 4489.14,2638.91 4489.14,2611.09 4482.11,2604.06 4467.86,2604.06 4470,2601.92 C14.1 ; U3.18 4506.13,2479.21 4558,2531.08 4558,2551.66 4619.4,2613.06 4650.6,2613.06 4665,2598.66 4665,2535 4620,2490 U5.6 U5.6@4610.35,2443.34 ; U3.18 4433.74,2518.82 4470,2555.08 C14.1
  Bottom Layer w10: v1(4135,2185) 4200,2250 v1(4200,2440) ; v1(4135,2705) 4140,2710 4140,2805 v1(4145,2810) ; v1(4285,1765) v1(4285,1865)
  other v2: 4355,2390.63 4394.37,2390.63 4355,2430 4394.37,2430 4315.63,2469.37 4355,2469.37 4394.37,2469.37
NetC3_1: C3.1 U1.30 | length 168.9
  Top Layer w10: C3.1 4518.27,1507.7 U1.30
NetC4_1: C4.1 C5.2 | length 1663.9
  Top Layer w10: C4.1 v1(3940,1980) ; C5.2 v1(4520,2790)
  Bottom Layer w10: v1(3940,1980) 3940,2744.04 4127.96,2932 4423,2932 4520,2835 v1(4520,2790)
NetC7_2: C7.2 U2.4 | length 266.6
  Top Layer w10: U2.4 3705.98,1460 3732.83,1433.15 C7.2
NetC8_1: C8.1 U1.19 | length 448.2
  Top Layer w10: C8.1 4046.44,1391.22 4052.3,1397.08 4052.3,1421.54 4069.3,1438.54 4069.3,1463.71 4154.27,1548.68 4214.98,1548.68 4301.39,1635.08 4301.39,1666.31 U1.19
NetC9_1: C9.1 U1.48 | length 1446.3
  Top Layer w10: C9.1 4133.7,1390.83 4147.51,1377.01 4147.51,1373.94 4186.64,1334.81 4247.21,1334.81 4249.29,1332.73 4310.71,1332.73 4312.79,1334.81 4558.29,1334.81 4857.51,1634.03 4857.51,1877.61 4817.63,1917.49 4782.76,1917.49 4684.33,2015.91 4684.33,2027.88 4669.92,2042.29 4638.69,2042.29 U1.48
NetC10_1: C10.1 U1.32 | length 611.3
  Top Layer w10: C10.1 v1(4185,1500) ; U1.32 4557.64,1641.06 v1(4605,1593.7)
  Bottom Layer w10: v1(4185,1500) 4511.3,1500 v1(4605,1593.7)
NetC11_1: C11.1 U1.64 | length 915.2
  Top Layer w10: v1(4185,2125) 4261.53,2125 4262.36,2124.16 U1.64 ; C11.1 4298.51,1398.94 4303.67,1398.94 4340,1435.27 v1(4340,1550)
  Bottom Layer w10: v1(4185,2125) 4185,2095 4340,1940 v1(4340,1550)
NetC14_2: C14.2 U3.20 | length 158.5
  Top Layer w10: U3.20 4384.53,2548.62 4457.89,2621.98 4467.86,2621.98 4470,2624.12 C14.2
NetC16_1: C16.1 U3.10 | length 525.8
  Top Layer w10: U3.10 4365.64,2351.45 4365.64,2330.54 4396.18,2300 4519.14,2300 4525,2305.86 4525,2474.04 4575,2524.04 4575,2528.86 4635,2588.86 C16.1
NetC19_2: C19.2 L1.1 R5.2 | length 440.5
  Top Layer w10: L1.1 3780,1895.79 3699,1976.79 3699,2094 3729.57,2124.57 R5.2 3889.57,2124.57 C19.2
NetJ2_1: J2.1 L1.2 U6.11 | length 957.1
  Top Layer w10: U6.11 3534.21,2332.72 3540.07,2326.86 3540.07,2270.07 3506.51,2236.51 J2.1 3511.25,2173.89 3590.22,2173.89 3682,2082.11 3682,1907.92 3745.5,1844.42 3814.5,1844.42 3821.53,1851.45 3821.53,1930.29 3811.83,1939.99 3789.7,1939.99 3780,1949.69 L1.2
NetR3_1: R3.1 U1.60 | length 251.3
  Top Layer w10: R3.1 4203.92,2260.63 4297.71,2166.84 4328.83,2166.84 4340.76,2154.92 4340.76,2123.69 U1.60
NetR4_1: R4.1 U5.5 | length 553.5
  Top Layer w10: U5.5 4564.86,2452.99 4559,2447.13 4559,2212.86 4564.86,2207 4712.04,2207 4714.04,2205 4764.37,2205 R4.1
NetR5_1: R5.1 U6.9 | length 474.6
  Top Layer w10: U6.9@3483.78,2415 3635,2415 3800,2250 R5.1
NRST: C2.1 P1.5 U1.7 | length 1220.5
  Top Layer w10: C2.1 4035,2036.69 4070,2001.69 ; 4136.53,1935.17 4070,2001.69 ; 4138.16,1936.8 4148.65,1926.31 4181.31,1926.31 4181.31,1924.87 U1.7 ; P1.5 4630,1660 4210,2080 4075.86,2080 4070,2074.14 4070,2001.69
SCL: R1.1 U1.58 U3.23 U4.4 U5.10 U6.19 | length 2614.9
  Top Layer w10: U6.19 4025.13,2624.06 ; v1(4045,2660) 4045,2649.18 4025.13,2629.31 4025.13,2624.06 ; 4214.57,2574.57 4145,2505 4145,2390.05 4334.2,2200.84 4342.92,2200.84 4380.13,2163.63 4380.13,2123.69 U1.58 ; U4.4 4288.39,2814.45 4305,2831.06 ; v1(4305,2895) 4305,2831.06 ; U3.23 4323.58,2509.65 4323.58,2527.72 4281.58,2569.72 4161.47,2569.72 4107.14,2624.06 4025.13,2624.06 ; U5.10 4703.5,2358.5 4715,2370 4715,2465 4792.17,2542.17 4792.17,2637.94 4800.64,2646.41 4803.32,2646.41 4809.17,2652.27 4809.17,2655.16 R1.1@4814.02,2660 ; R1.1 R1.1@4814.02,2660 ; 4305,2831.06 4343.94,2870 4604.02,2870 R1.1@4814.02,2660
  Bottom Layer w10: v1(4045,2660) 4045,2825 4117,2897 4255.33,2897 4257.33,2895 v1(4305,2895)
SDA: R2.1 U1.59 U3.24 U4.3 U5.9 U6.18 | length 2584.3
  Top Layer w10: v1(4090,2585) 3960.47,2585 U6.18 3956.22,2550 4153.76,2352.46 4155.1,2352.46 4323.72,2183.84 4335.88,2183.84 4360.44,2159.28 4360.44,2123.69 U1.59 ; v1(4220,2525) 4225.51,2519.49 4303.9,2519.49 4305.79,2517.6 U3.24 ; v1(4240,2860) 4262.8,2837.2 U4.3 ; U5.9 4676.34,2390 4689.34,2403 4689.34,2488.52 4710,2509.18 v1(4710,2520) ; v1(4770,2430) 4771.56,2430 4793.85,2452.28 R2.1
  Bottom Layer w10: v1(4240,2860) 4120,2860 4090,2830 4090,2545 4110,2525 v1(4220,2525) 4220,2665 4275,2720 4510,2720 v1(4710,2520) 4710,2518.02 4737.29,2490.73 4737.29,2462.71 v1(4770,2430)
SWDCL: P1.4 U1.49 | length 636
  Top Layer w10: U1.49 4557.64,1777.16 4605.34,1729.46 4687.99,1729.46 4718.54,1760 P1.4
SWDIO: P1.3 U1.46 | length 236
  Top Layer w10: U1.46 4638.69,2002.92 4672.08,2002.92 P1.3
VCC: C1.1 C5.1 C7.1 C8.2 C9.2 C10.2 C11.2 C12.2 C13.2 C15.1 C17.2 C18.2 P1.1 R1.2 R2.2 R4.2 U1.1 U1.13 U2.1 U2.2 U3.8 U3.13 U4.2 U4.6 U4.8 U5.1 U5.11 U6.2 U6.23 | length 6307.2
  Top Layer w10: U6.2 U6.23 4052.72,2797.28 4087.05,2762.95 4213.5,2762.95 ; U2.1 U2.2 3891.3,1360 3929.02,1397.72 C7.1 ; C1.1 3868.88,1735.43 3893.67,1760.23 3936.96,1760.23 4054.02,1877.28 C13.2 ; C7.1@3930.98,1397.72 3973.7,1440.43 C8.2 4015.39,1440.04 4046.76,1440.04 ; C13.2@4055.98,1877.28 4126.85,1806.42 4150.08,1806.42 ; v1(4110,2040.9) 4150,2040.9 4151.4,2042.29 4181.31,2042.29 U1.1 4207.73,2042.64 4209.51,2040.86 4214.66,2040.86 4335,1920.52 4335,1850 4290.58,1805.58 4181.65,1805.58 U1.13@4181.16,1806.07 ; U1.13 4181.31,1806.07 U1.13@4181.16,1806.07 ; U4.2 4237.2,2797.25 4237.2,2786.65 4213.5,2762.95 ; 4239.09,2797.25 4268.3,2768.05 4269.98,2768.05 ; 4246.89,1406.51 4231.21,1390.83 C10.2 4171.3,1404.53 4151.3,1404.53 4129.49,1426.34 4113.7,1426.34 C9.2 4081.49,1421.53 4076.33,1421.53 4069.3,1414.5 4069.3,1390.04 4039.78,1360.52 3991.33,1360.52 3984.3,1367.55 3984.3,1414.89 3992.45,1423.04 4029.76,1423.04 4046.76,1440.04 ; U4.6 4264.69,2750.39 4264.69,2762.75 4269.98,2768.05 ; C11.2 4261.49,1411.13 4256.33,1411.13 4249.3,1404.1 4249.3,1356.76 4256.33,1349.73 4303.67,1349.73 4321.84,1367.9 4321.84,1385.03 4340.01,1403.2 4348.3,1403.2 4381.06,1370.43 C12.2 4395.43,1360 C15.1 4476.36,1361.36 4548.64,1361.36 C18.2 ; v1(4305,2645) 4263.87,2645 4245.08,2663.79 4214.77,2663.79 4175.98,2625 C17.2 4175,2708.94 4211.61,2745.55 U4.8 4213.5,2750.39 4213.5,2762.95 ; U3.8 4325.47,2320.51 4345,2300.98 v1(4345,2295) ; C5.1 4386.46,2788.03 4371.77,2773.35 4275.28,2773.35 4269.98,2768.05 ; U3.13 4434.13,2380.39 4484.61,2380.39 v1(4485,2380) ; U5.1 4593.35,2322.17 4593.35,2306.65 4600,2300 v1(4600,2260) ; 4598.16,2312.19 4605.19,2305.17 4634.81,2305.17 4641.84,2312.19 4641.84,2317.35 U5.11 4702.01,2327.01 4732,2357 4732,2457 4762.72,2487.72 R2.2 ; P1.1 4815,2167.06 4844.8,2196.85 4844.8,2278.4 4837.77,2285.43 4834.57,2285.43 R4.2 4820,2376.93 4840.83,2397.76 4840.83,2466.9 4824.85,2482.87 4819.84,2482.87 R2.2 ; R1.2 R2.2 ; 4046.76,1440.04 4052.3,1445.58 4052.3,1604.48 4138.16,1690.34 4138.16,1794.15 4150.08,1806.07 U1.13@4181.16,1806.07
  Bottom Layer w10: v1(4110,2040.9) 4110,2102.33 4221.51,2213.84 4263.84,2213.84 v1(4345,2295) ; v1(4305,2645) 4305,2495.8 4293.79,2484.59 4293.79,2346.21 v1(4345,2295) ; v1(4600,2260) 4600,2265 v1(4485,2380) 4485,2375 4405,2295 v1(4345,2295)
VIN: C6.2 J1.1 U2.5 U2.8 | length 1057.3
  Top Layer w10: U2.8 3517.01,1310 3540.82,1333.81 3540.82,1436.19 3517.01,1460 U2.5 3485.51,1594.13 3488.33,1596.95 3488.33,1724.78 J1.1 3670.12,1595 3861.57,1595 3938.03,1671.46 C6.2
pads on no net: U1.2 U1.3 U1.4 U1.5 U1.6 U1.8 U1.9 U1.10 U1.11 U1.14 U1.15 U1.16 U1.17 U1.20 U1.21 U1.22 U1.23 U1.24 U1.25 U1.26 U1.27 U1.28 U1.29 U1.33 U1.34 U1.35 U1.36 U1.37 U1.38 U1.39 U1.40 U1.41 U1.42 U1.43 U1.44 U1.45 U1.50 U1.51 U1.52 U1.53 U1.54 U1.55 U1.56 U1.57 U1.61 U1.62 U2.3 U2.6 U2.7 U3.2 U3.3 U3.4 U3.5 U3.6 U3.7 U3.12 U3.14 U3.15 U3.16 U3.17 U3.19 U3.21 U3.22 U5.7 U5.8 U6.1 U6.3 U6.4 U6.5 U6.6 U6.7 U6.8 U6.14 U6.15 U6.16 U6.17 U6.20 U6.21 U6.22

## Polygon pours and split planes (outlines as drawn)
GND on Layer 1 (split plane): 4864.9,1255.1 3380.1,1255.1 3380.1,2954.9 4864.9,2954.9
GND on Layer 2 (split plane): 4864.9,1255.1 3380.1,1255.1 3380.1,2954.9 4864.9,2954.9

## Silkscreen, mask and mechanical layers (free items; w line width, h text height)
Top Overlay:
  the board outline again, w10